# Altium PCB Driver Morpheus v5.2 PONTE H.PcbDoc
Units mm, origin at the board's own origin, x right, y up, seen from the top; angles counter-clockwise.
Board outline 51.56 x 48.03 mm, 2 copper layers (Top Layer, Bottom Layer); 56 components, 26 nets, 158 pads, 23 vias.
Unrouted connection lines stored in the file: 9.
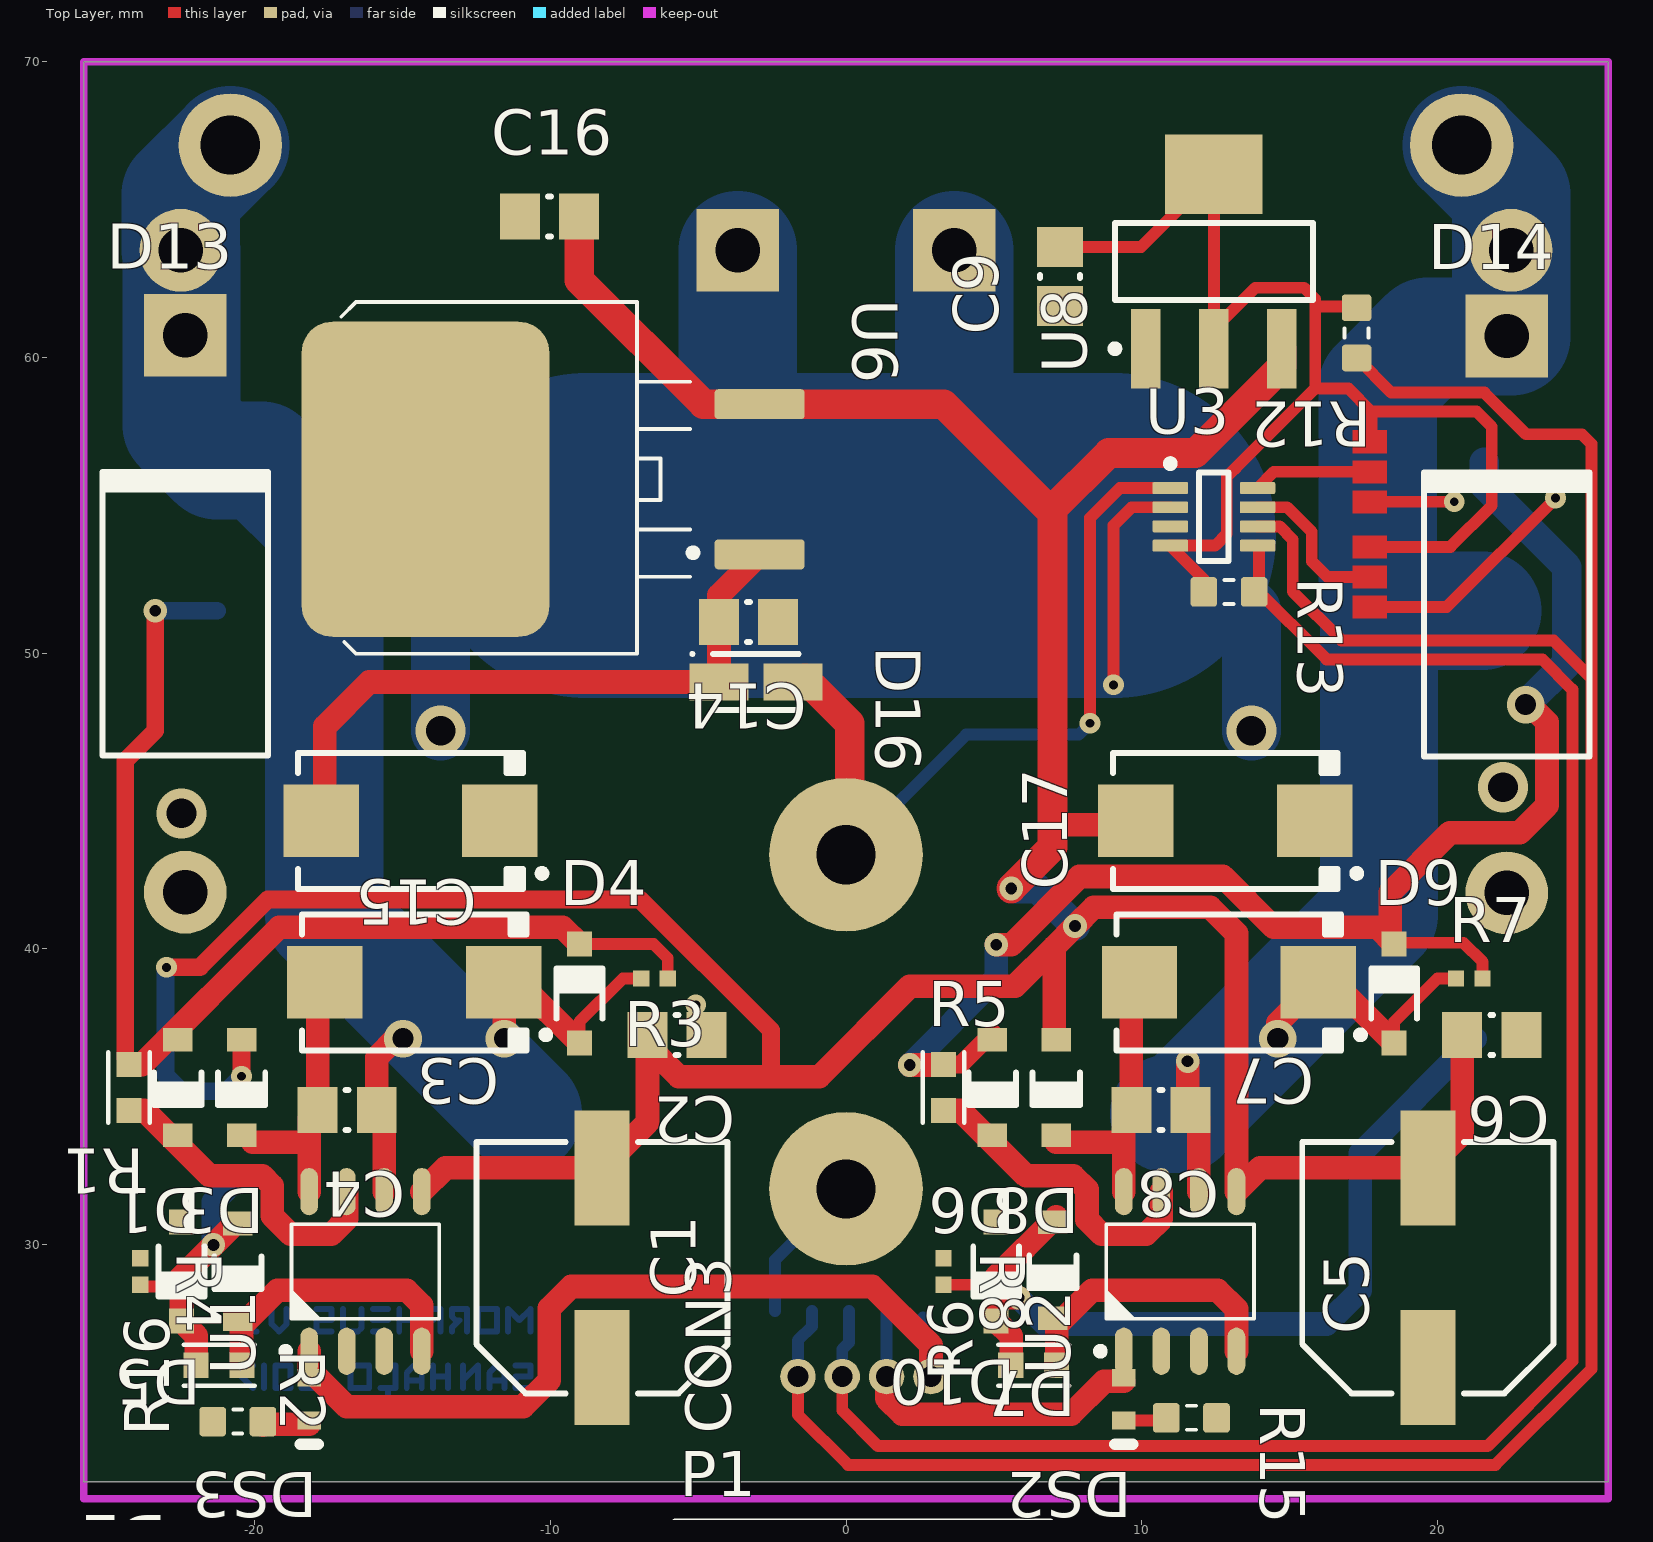
[diagram p0: Top Layer view]
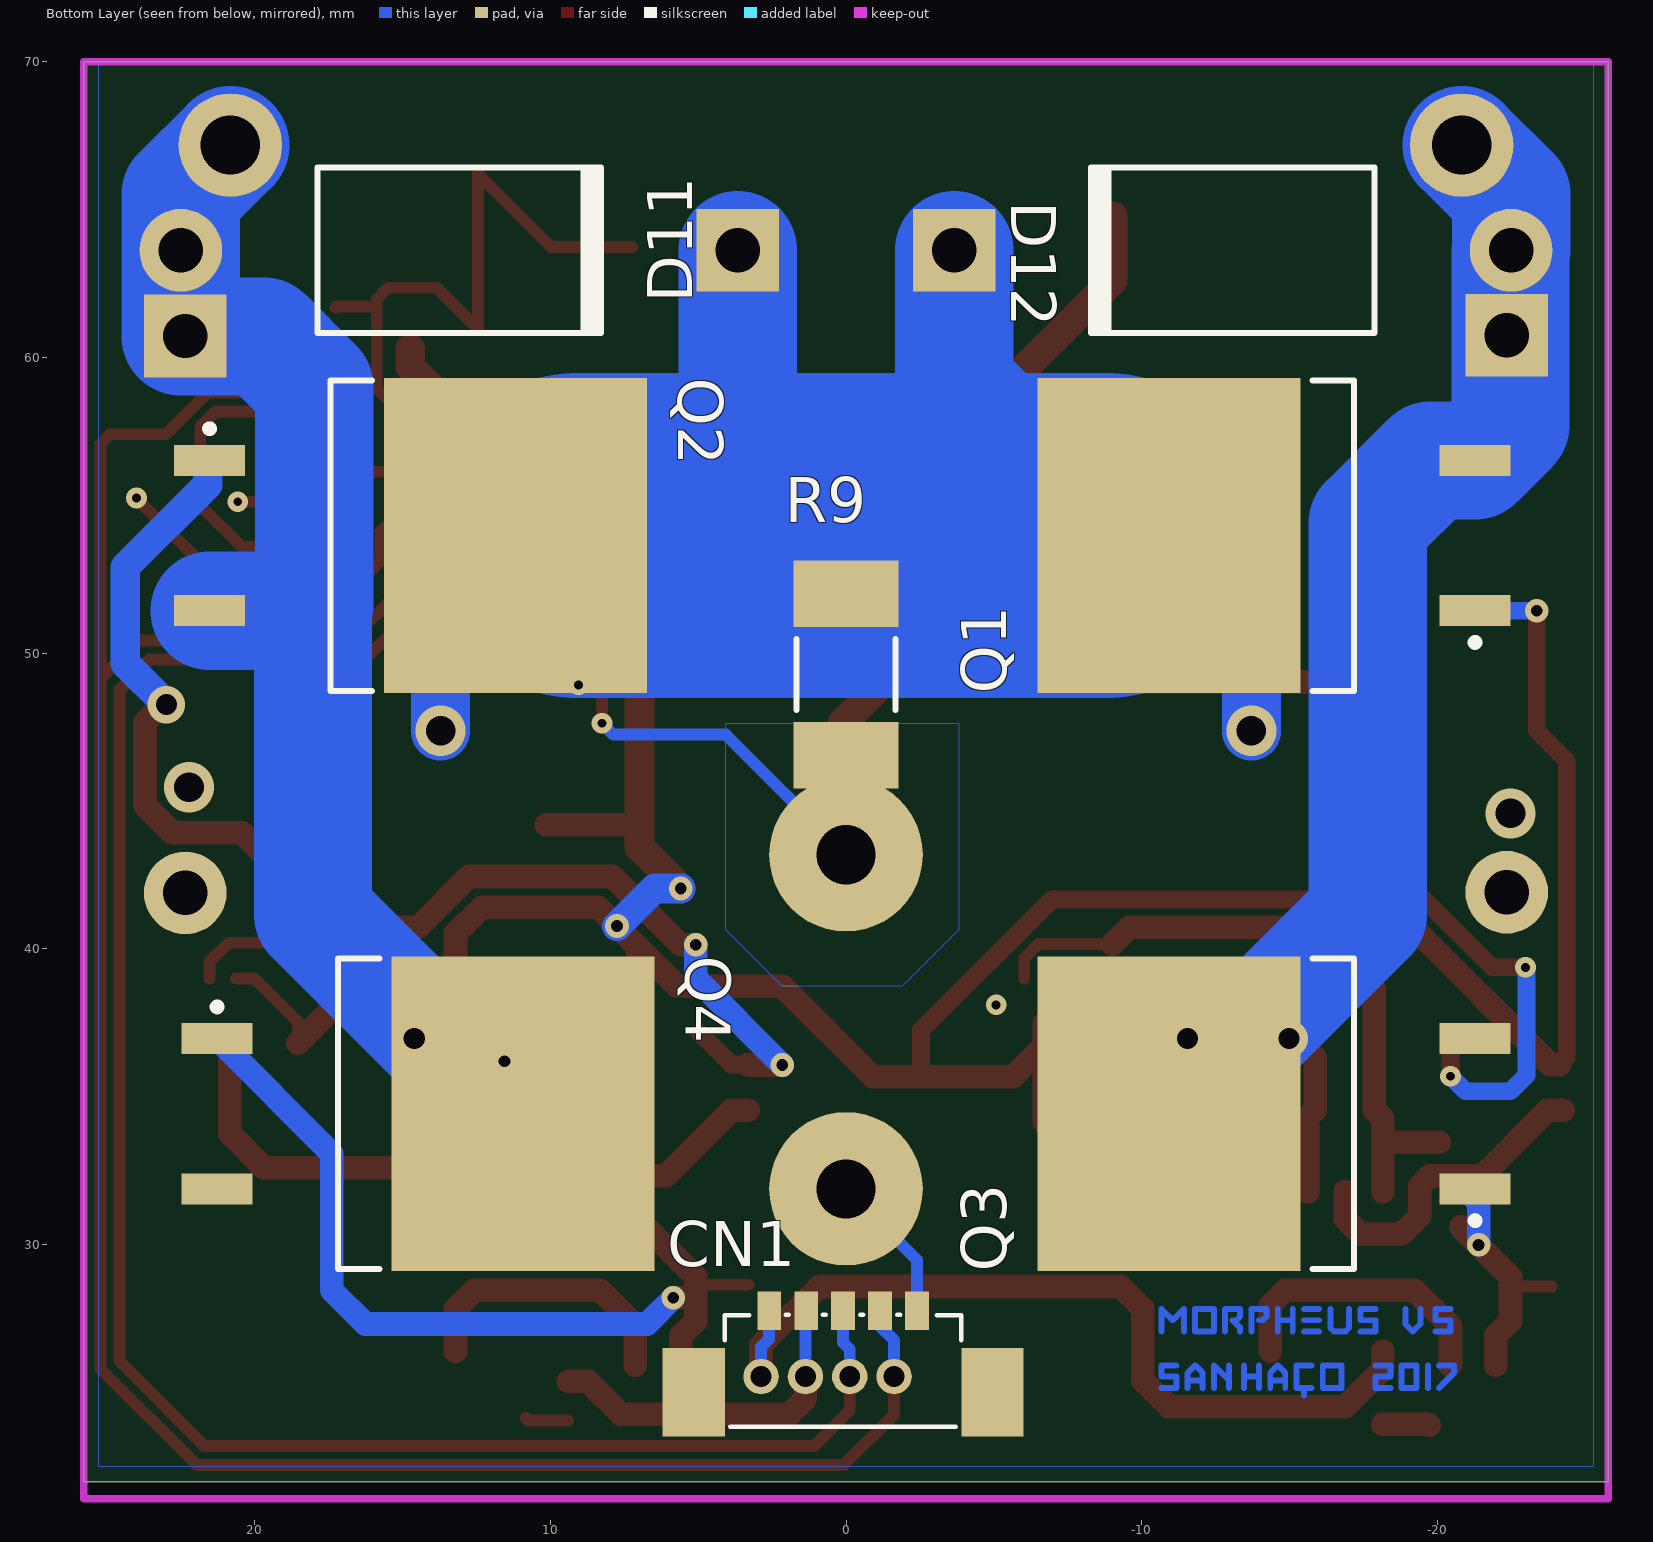
[diagram p1: Bottom Layer view, seen from below]

## Layer stack, top to bottom
Top Solder: solder mask 0.0102, Solder Resist, Dk 3.5
Top Layer: signal copper 0.0356
Dielectric 1: dielectric 0.32, FR-4, Dk 4.8
Bottom Layer: signal copper 0.0356
Bottom Solder: solder mask 0.0102, Solder Resist, Dk 3.5

## Board outline
-25.781,21.971 -25.781,70 25.781,70 25.781,21.971

## Design rules (kind name [scope] priority, off if disabled: settings)
Clearance [All] p1: gap=0.24 ignorepadtopadclearanceinfootprint=FALSE except(0: Arc-Hole Track-Hole SMDPad-Hole THPad-Hole Via-Hole Fill-Hole Poly-Hole Region-Hole Text-Hole; 0.7: Track-Region)
PlaneConnect [All] p1: planeconnectstyle=Direct reliefexpansion=0.508 reliefentries=4 reliefconductorwidth=0.254 reliefairgap=0.254
PolygonConnect [All] p1: connectstyle=Direct reliefconductorwidth=0.254 reliefentries=4 polygonreliefangle="90 Angle" airgapwidth=0.254
RoutingVias [All] p1: holewidth=0.3 width=0.4 viastyle="Through Hole" minholewidth=0.3 minwidth=0.4 maxholewidth=0.4 maxwidth=0.5
SMDNeckDown [InNet('No Net')] p1: percent=70.000
SolderMaskExpansion [All] p1: expansion=0.102
Width [All] p1: maxlimit=15 minlimit=0.01 preferedwidth=0.4
29 further rules are at their usual default settings.

## Classes and differential pairs
component class "Driver Morpheus v5.2 SENSOR CORRENTE": C9 R12 R13 U3
component class "Driver Morpheus v5.2 PONTE H": C1 C2 C3 C4 C5 C6 C7 C8 C14 C15 C16 C17 C18 CN1 CON3 D1 D2 D3 D4 D5 D6 D7 D8 D9 D10 D11 D12 D13 D14 D16 DS2 DS3 P1 Q1 Q2 Q3 Q4 R1 R2 R3 R4 R5 R6 R7 R8 R9 R15 R16 U1 U2 U6 U8

## Components (designator, comment, footprint, x,y, rotation, side; value= is the part's Value field where it differs from the comment)
C1 "100uF 25v" CAPAE9083X70M -8.255,29.21 r90 top
C2 "CAP 100nF 25V 0805(2012)" CAPC0805(2012)145_M#1 -5.715,37.084 r180 top value=100nF
C3 "Cap_10u_35v" "CAP POL 2917/7343" -14.605,38.862 r180 top
C4 "CAP 100nF 25V 0805(2012)" CAPC0805(2012)145_M#2 158.766,-39.497 r180 top value=100nF
C5 "100uF 25v" CAPAE9083X70M 19.685,29.21 r90 top
C6 "CAP 100nF 25V 0805(2012)" CAPC0805(2012)145_M#1 21.844,37.084 r180 top value=100nF
C7 "Cap_10u_35v" "CAP POL 2917/7343" 12.954,38.862 r180 top
C8 "CAP 100nF 25V 0805(2012)" CAPC0805(2012)145_M#2 186.293,-39.497 r180 top value=100nF
C9 "CAP 100nF 25V 0805(2012)" CAPC0805(2012)145_M#1 7.239,62.738 r90 top value=100nF
C14 "CAP 100nF 25V 0805(2012)" CAPC0805(2012)145_M#1 -3.302,51.054 r180 top value=100nF
C15 "Cap_10u_35v" "CAP POL 2917/7343" -14.732,44.323 r180 top
C16 "CAP 100nF 25V 0805(2012)" CAPC0805(2012)145_M#1 -10.033,64.77 r0 top value=100nF
C17 "Cap_10u_35v" "CAP POL 2917/7343" 12.827,44.323 r180 top
C18 "CAP 100nF 25V 0805(2012)" CAPC0805(2012)145_M#1 31.575,42.75 r0 top value=100nF
CN1 "53398-0571" 53398-05 0.1,26.5 r180 bottom
CON3 "B4B-ZR" B4B-ZR 2.873,25.527 r180 top
D1 "1N4148W" JSCJ-SOD-123-2_V -22.606,35.306 r270 top
D2 "1N4148W" JSCJ-SOD-123-2_V -20.572,29.083 r270 top
D3 "1N4148W" JSCJ-SOD-123-2_V -20.447,35.306 r270 top
D4 "MMSZ5246B-E3-08" VISH-SOD-123-2_V -9.017,38.481 r90 top
D5 "MMSZ5246B-E3-08" VISH-SOD-123-2_V -22.479,29.083 r270 top
D6 "1N4148W" JSCJ-SOD-123-2_V 4.953,35.306 r270 top
D7 "1N4148W" JSCJ-SOD-123-2_V 7,29.125 r270 top
D8 "1N4148W" JSCJ-SOD-123-2_V 7.112,35.306 r270 top
D9 "MMSZ5246B-E3-08" VISH-SOD-123-2_V 18.542,38.481 r90 top
D10 "MMSZ5246B-E3-08" VISH-SOD-123-2_V 5.08,29.083 r270 top
D11 "Diode 1N5408" DO-201AD -13.081,63.627 r0 bottom
D12 "Diode 1N5408" DO-201AD 13.081,63.627 r180 bottom
D13 "Diode 1N5408" DO-201AD -22.352,51.33 r90 top
D14 "Diode 1N5408" DO-201AD 22.352,51.308 r90 top
D16 "100V; 1.5A" DIOM2818X18M -3.048,49.022 r0 top value="Vf = 1.15V @ 1.5A (Max)"
DS2 "TLMB1100-GS08" VISH-TLMX1100-2_V 9.398,24.765 r270 top
DS3 "TLMB1100-GS08" VISH-TLMX1100-2_V -18.161,24.765 r270 top
P1 "Header 5" HDR1X5 5.65,19.35 r180 top
Q1 "IRF3205S" D2PAK_N -14.478,53.975 r0 bottom
Q2 "IRF3205S" D2PAK_N 14.732,53.975 r180 bottom
Q3 "IRF3205S" D2PAK_N -14.478,34.417 r0 bottom
Q4 "IRF3205S" D2PAK_N 14.478,34.417 r180 bottom
R1 "22" SMD-0603-RES -24.257,35.306 r180 top
R2 "22" SMD-0603-RES -21.209,25.908 r270 top
R3 "RC0402JR-071KL" RES-0402 -6.477,38.989 r0 top value=1K
R4 "RC0402JR-071KL" RES-0402 -23.876,29.083 r270 top value=1K
R5 "22" SMD-0603-RES 3.302,35.306 r0 top
R6 "22" SMD-0603-RES 6.35,25.908 r90 top
R7 "RC0402JR-071KL" RES-0402 21.082,38.989 r0 top value=1K
R8 "RC0402JR-071KL" RES-0402 3.302,29.083 r270 top value=1K
R9 "KRL9045-C-R008-F-T1" RESC6332X09M 0,49.276 r90 bottom
R12 "Thick Film" RESC1608X55N 17.272,60.833 r270 top value=10K
R13 "Thick Film" RESC1608X55N 12.954,52.07 r0 top value=10K
R15 "Thick Film" RESC1608X55N 11.684,24.13 r0 top value=220R
R16 "Thick Film" RESC1608X55N -20.574,24.003 r180 top value=220R
U1 "IR2184" SOIC127P600X175-8AN -16.256,29.083 r90 top
U2 "IR2184" SOIC127P600X175-8AN 11.303,29.083 r90 top
U3 "INA219AIDCNR" DCN0008A_M 12.446,54.61 r0 top
U6 "L7812" D2PAK-3 -8.572,55.88 r0 top
U8 "LD1117AS33TR" SOT-223_M 12.446,63.246 r90 top

## Footprints (in the part's own frame and the unit in brackets; to place one, negate y for a bottom-side part, rotate by r counter-clockwise, add the part's x,y. Pads: shape width x height; smd on the part's side, far side on the other; paste and mask are expansions set on the pad)
53398-05 [mm]
  rect 0.8x1.3 smd: 1(-2.5,1.25) 2(-1.25,1.25) 3(0,1.25) 4(1.25,1.25) 5(2.5,1.25)
  rect 2.1x3 smd: PAD1(-5.05,-1.5) PAD2(5.05,-1.5)
  silkscreen extent -4,-2.67 4,1.12, body extent -5.7,-2.61 5.7,1.59, height 4.7
B4B-ZR [mm]
  round 1.2 hole 0.7: 1(0,0) 2(1.5,0) 3(3,0) 4(4.5,0)
  body extent -1.5,-1.3 6,2.2, height 4.5
"CAP POL 2917/7343" [mm] "Molded Capacitor, 2-Leads, Body 7.30x4.30mm, IPC Medium Density"
  rect 2.55x2.45 smd: 1(-3.025,0) 2(3.025,0)
  silkscreen extent -4.58,-2.3 3.8,2.3, body extent -3.65,-2.15 3.65,2.15, height 4.1
CAPAE9083X70M [mm] "Aluminum Electrolytic Capacitor, Body 8,30x8,30x7,00mm, IPC Low Density"
  rect 3.9x1.85 smd: 1(-3.375,0) 2(3.375,0)
  silkscreen extent -4.25,-4.25 4.25,4.25, body extent -4.25,-4.25 4.25,4.25, height 7
CAPC0805(2012)145_M#1 [mm] "Chip Capacitor, Body 2.0x1.2mm, Height 1.45mm, IPC Low Density"
  rect 1.35x1.55 smd: 1(-1,0) 2(1,0)
  silkscreen extent -0.05,-0.67 0.05,0.67, body extent -1.1,-0.72 1.1,0.72, height 1.45
CAPC0805(2012)145_M#2 [mm] "Chip Capacitor, Body 2.0x1.2mm, Height 1.45mm, IPC Low Density"
  rect 1.35x1.55 smd: 1(174.641,-74.041) 2(176.641,-74.041)
  silkscreen extent 175.59,-74.72 175.69,-73.37, body extent 174.54,-74.77 176.74,-73.32, height 1.45
D2PAK-3 [mil] "D-PAK/TO-263-3; 3 Leads (1 Cropped); Body 14.7 (inc. leads) x 10.2 mm (LxW max)"
  round 20 on Mech15: 0(0,0)
  rrect25% 120x40 smd: 1(222.5,-100) 3(222.5,100)
  rrect25% 330x420 smd: 2(-222.5,0)
  silkscreen extent -335,-232 139,236, body extent -361,-197 256,197, height 189
D2PAK_N [mm] "D-PAK/TO-263-3; 3 Leads (1 Cropped); Body 14.7 (inc. leads) x 10.2 mm (LxW max)"
  rect 2.4x1.05 smd: 1(-6.8,2.54) 3(-6.8,-2.54)
  rect 8.9x10.65 smd: 2(3.55,0)
  silkscreen extent -6.92,-5.25 -1.3,5.25, body extent -2.7,-5.28 6.3,5.28, height 4.69
DCN0008A_M [mm] "SOT23, 8-Leads, Body 3x1.75mm, Pitch 0.65mm, IPC Low Density"
  rrect22% 1.2x0.4 smd: 1(-1.475,0.975) 2(-1.475,0.325) 3(-1.475,-0.325) 4(-1.475,-0.975) 5(1.475,-0.975) 6(1.475,-0.325) 7(1.475,0.325) 8(1.475,0.975)
  silkscreen extent -1.6,-1.5 0.5,1.92, body extent -0.88,-1.5 0.87,1.5, height 1.45
DIOM2818X18M [mm] "Molded Diode, 2-Leads, Body 2,80x1,80mm, IPC Low Density"
  rect 2x1.25 smd: A(1.25,0) K(-1.25,0)
  silkscreen extent -2.2,-0.95 1.45,1, body extent -1.45,-0.95 1.45,0.95, height 1.8
DO-201AD [mm] "Diode, Axial; Body 9.5 x 5.6 mm (LxDia. max), Lead Dia. 1.32 mm (max)"
  round 2.8 hole 1.5: 1(-9.42,0)
  rect 2.8x2.8 hole 1.5: 2(9.42,0)
  silkscreen extent -4.8,-2.8 4.9,2.8
HDR1X5 [mm] "Connector; Header; 5 Position"
  rect 1.5x1.5 hole 0.9: 1(0,0)
  round 1.5 hole 0.9: 2(2.54,0) 3(5.08,0) 4(7.62,0) 5(10.16,0)
  silkscreen extent -1.27,-1.27 11.43,1.27
JSCJ-SOD-123-2_V [mm] "SMD, 2-Leads, Body 2.7x1.6mm, Height 1.25mm"
  rect 0.8x1 smd: 1(-1.62,0) 2(1.62,0)
  silkscreen extent -0.5,-0.8 0.6,0.8, body extent -1.35,-0.8 1.35,0.8, height 1.25
RES-0402 [mm]
  rect 0.55x0.55 smd: 1(-0.45,0) 2(0.45,0)
  body extent -0.53,-0.27 0.53,0.28, height 0.4
RESC1608X55N [mm] "Chip Resistor, Body 1.6x0.8mm, EIA 0603, IPC Medium Density"
  round 0.254 on Mech15: 0(0,0)
  rrect25% 0.9x1 smd: 1(-0.85,0) 2(0.85,0)
  Top Layer pour cut-out: -0.6,0.5 -0.4,0.7 0.4,0.7 0.6,0.5 0.6,-0.5 0.4,-0.7 -0.4,-0.7 -0.6,-0.5
  silkscreen extent -0.15,-0.41 0.15,0.41, body extent -0.87,-0.47 0.88,0.48, height 0.54
RESC6332X09M [mm] "Chip Resistor, 2-Leads, Body 6,35x3,18mm, IPC Low Density"
  rect 2.25x3.55 smd: 1(-2.725,0) 2(2.725,0)
  silkscreen extent -1.2,-1.68 1.2,1.68, body extent -3.3,-1.72 3.3,1.72, height 0.87
SMD-0603-RES [mm]
  rect 0.85x0.85 smd: 1(0,0.775) 2(0,-0.775)
  silkscreen extent -0.7,-1.2 0.7,1.2, body extent -0.4,-0.85 0.4,0.85, height 0.56
SOIC127P600X175-8AN [mm] "SOIC, 8-Leads, Body 4.9x3.9mm, Pitch 1.27mm, IPC Medium Density"
  round 1 on Mech15: 0(0,0)
  oval 1.6x0.6 smd: 1(-2.7,1.905) 2(-2.7,0.635) 3(-2.7,-0.635) 4(-2.7,-1.905) 5(2.7,-1.905) 6(2.7,-0.635) 7(2.7,0.635) 8(2.7,1.905)
  silkscreen extent -2.82,-2.5 1.6,2.82, body extent -3,-2.45 3,2.45, height 1.75
SOT-223_M [mm] "SOT223, 4-Leads, Body 6.5x3.5mm, Pitch 2.3mm, Lead Span 7mm, IPC Low Density"
  rect 2.7x1 smd: 1(-2.95,2.3) 2(-2.95,0) 3(-2.95,-2.3)
  rect 2.7x3.3 smd: 4(2.95,0)
  silkscreen extent -3.07,-3.35 1.3,3.47, body extent -1.85,-3.35 1.85,3.35, height 1.8
VISH-SOD-123-2_V [mm] "SMD, 2-Leads, Body 2.7x1.55mm, Height 1.35mm"
  rect 0.85x0.85 smd: 1(-1.675,0) 2(1.675,0)
  silkscreen extent -0.85,-0.78 0.85,0.78, body extent -1.35,-0.77 1.35,0.77, height 1.35
VISH-TLMX1100-2_V [mm] "SMD, 2-Leads, Body 1.6x0.8mm"
  rect 0.6x0.8 smd: 1(-0.725,0) 2(0.725,0)
  silkscreen extent 1.53,-0.3 1.53,0.3, body extent -0.8,-0.4 0.8,0.4, height 0.65

## Part data
C1: library part Cap_10u_35v
C2 C4 C6 C8 C9 C14 C16 C18: library part CMP-1036-04408-1, "CAP 100nF 25V ±5% 0805 (2012 Metric) Thickness 1.45mm SMD", Case-EIA=0805, Case-Metric=2012, Rated Voltage="25 V", Tolerance=±5%, Max Thickness="1.45 mm", Technology=SMT
C5: library part Cap_100u_25v, "Cap Tântalo"
CN1: library part 53398-0571-5, "CONN HEADER 5POS 1.25MM VERT SM", Cod EMS=05.285.005.201, Part No=53398-0571
D1 D2 D3 D6 D7 D8: library part CMP-0914-00001-1, "Fast Switching Diode, 75 V, 150 mA, 2-Pin 2.7 x 1.6 x 1.25 mm SMD, Tape and Reel", Manufacturer="Changjiang Electronics", ComponentLink1Description="Manufacturer URL", ComponentLink1URL=http://www.cj-elec.com/, ComponentLink2Description=Datasheet, ComponentLink2URL=http://www.cj-elec.com/txUpfile/20121613352740313.pdf, ComponentLink3Description="Package Specification", ComponentLink3URL=http://www.cj-elec.com/txUpfile/201412112231195145.pdf, DatasheetVersion="Rev. A", IO (mA)=150, IR (uA)=1, Mounting Technology="Surface Mount", PackageDescription="2-Pin SMD, Body 2.7 x 1.6 mm, Height 1.25 mm", PackageReference=SOD-123-2, PackageVersion="Rev. A", Packing="Tape and Reel", PartNumber=1N4148W, PD (mW)=350, Trr (ns)=4, TSTG (degC)="-55 to 150", VF (V)=1.25, VR (V)=75
D4 D5 D9 D10: library part CMP-0931-00032-1, "Small Signal Zener Diode, 16 V +/- 5%, -55 to 155 degC, 2-Pin SOD-123, RoHS, Tape and Reel", Manufacturer="Vishay Semiconductor", Operating Temperature="-55 to 150 degC", Power Dissipation (mW)=500, Test Current (IZT1) (mA)=7.8, Tolerance="+/- 5%", Zener Voltage (NOM.) (V)=16, ComponentLink1Description="Manufacturer URL", ComponentLink1URL=http://www.vishay.com/, ComponentLink2Description=Datasheet, ComponentLink2URL=http://www.vishay.com/docs/85774/mmsz5225.pdf, ComponentLink3Description="Package Specification", ComponentLink3URL=http://www.vishay.com/docs/85774/mmsz5225.pdf, DatasheetVersion="Rev. 1.9", Int. Construction=Single, Mounting Technology="Surface Mount", PackageDescription="2-Pin SMD, Body 2.7 x 1.55 mm, Height 1.35 mm", PackageReference=SOD-123-2, PackageVersion="Rev. 1.9", Packing="Tape and Reel", PartNumber=MMSZ5246B-E3-08, RoHS=TRUE, Zener Impedance (IZT1) (Max.) (Ohm)=17
D11 D12 D13 D14: "3 Amp Medium Power Silicon Rectifier Diode", ComponentLink1Description="Manufacturer Link", ComponentLink1URL=http://www.irf.com/, DatasheetVersion=Aug-1984, LatestRevisionDate=17-Jul-2002, LatestRevisionNote="Re-released for DXP Platform.", PackageDescription="Diode, Axial; Body 9.5 x 5.3 mm (LxDia. max), Lead Dia. 1.32 mm (max)", PackageReference=DO-201AD, Published=8-Jun-2000, Publisher="Altium Limited"
D16: library part DIODE_100V_1.5A_SMA, "Diode SMD 100V 1.5A SMA", Manufacturer 1="Diodes Inc", Manufacturer Part Number 1=S2BA-13-F, Package / Case="DO-214AC, SMA", Supplier Part Number 1=S2BA-FDICT-ND, Diode Type=Standard, Material=Si, Ratings="100V; 1.5A", SCDType=source, Supplier 1=Digi-Key
DS2 DS3: library part CMP-1666-00028-1, "Blue LED, 10 mA, 3.9 V, -40 to 100 degC, 2-Pin SMD (0603), RoHS, Tape and Reel", Capacitance="10 nF", Case\Package=Radial, Max Operating Temperature="125 degC", Min Operating Temperature="-55 degC", Package Quantity=500, Tolerance=10%, Type (Capacitors)=X7R, Voltage Rating="100 V", ComponentLink1Description="Manufacturer URL", ComponentLink1URL=http://www.vishay.com/, ComponentLink2Description=Datasheet, ComponentLink2URL=http://download.siliconexpert.com/pdfs/2016/8/7/12/43/26/667/vsh_/manual/379263299541529tlmb1100.pdf, DatasheetVersion="Rev. 2.7, 03/2016", Height="2.54 mm", Lead Pitch="2.54 mm", Length="5.33 mm", Mount="Through Hole", PackageDescription="2-Pin Surface Mount Device, Body 1.6 x 0.8 mm", PackageReference=0603, Packaging=Bulk, Pins=2, Radiation Hardening=No, REACH SVHC="No SVHC", RoHSCompliant=true, Width="3.81 mm"
P1: "Header, 5-Pin", LatestRevisionDate=17-Jul-2002, LatestRevisionNote="Re-released for DXP Platform.", Publisher="Altium Limited"
Q1 Q2 Q3 Q4: "HEXFET Power MOSFET", ComponentLink1Description="Manufacturer Link", ComponentLink1URL=http://www.irf.com/, ComponentLink2Description=Datasheet, ComponentLink2URL=http://www.irf.com/product-info/datasheets/data/irf3205s.pdf, DatasheetVersion=Aug-1997, LatestRevisionDate=20-Nov-2009, LatestRevisionNote="IPC-7351 Footprint Added.", PackageDescription="3-Pin Transistor Outline Package 2.54 mm Pitch, 15.1 mm Lead Span", PackageReference=D2PAK, Published=8-Jun-2000, Publisher="Altium Limited"
R1 R2 R5 R6: library part ERJ-3EKF22R0V, "RES SMD 22 OHM 1% 1/10W 0603", Digi-Key Part Number=P22.0HCT-ND, Manufacturer="Panasonic Electronic Components", Operating Temperature="-55°C ~ 155°C", Package / Case="0603 (1608 Metric)", Power (Watts)="0.1W, 1/10W", Supplier Device Package=0603, Temperature Coefficient=±100ppm/°C, Tolerance=±1%, @ qty=1500, Composition="Thick Film", Datasheets=http://industrial.panasonic.com/www-cgi/jvcr13pz.cgi?E+PZ+3+AOA0002+ERJ3EKF22R0V+7+WW, Factory Stock=0, Failure Rate=-, Features="Automotive AEC-Q200", Height - Seated (Max)="0.022\" (0.55mm)", Image=//media.digikey.com/Photos/Panasonic%20Photos/MFG_ERJ-P6W%20Series.jpg, Minimum Quantity=1, Number of Terminations=2, Packaging="Cut Tape (CT)", Part Number=ERJ-3EKF22R0V, Part Status=Active, Quantity Available=100321, Series=ERJ, Size / Dimension="0.063\" L x 0.031\" W (1.60mm x 0.80mm)", Unit Price (USD)=0.00379
R3 R4 R7 R8: library part "RES 1K 0402", "RES SMD 1K OHM 5% 1/16W 0402"
R9: library part CMP-1666-00018-2, "Chip Resistor, 0.008 Ohm, +/- 1%, 4 W", Case/Package=1206, Case Code (Metric)=3216, Max Operating Temperature="170 degC", Min Operating Temperature="-65 degC", PartNumber=WSLP12061L000FEA, Resistance="0.001 Ohm", Tolerance=1%, Case Code (Imperial)=1206, ComponentLink1Description="Manufacturer URL", ComponentLink1URL=http://www.vishay.com/, ComponentLink2Description=Datasheet, ComponentLink2URL=http://www.farnell.com/datasheets/2049155.pdf, DatasheetVersion=04/2015, Height="0.635 mm", Length="3.2 mm", Mounting Technology="Surface Mount", PackageDescription="2-Pin Surface Mount Device, Body 3.2 x 1.6 mm", Packaging="Tape and Reel", REACH SVHC=Unknown, RoHSCompliant=True, Width="1.6 mm"
R12 R13: library part RES_10K_0603_1%, "Resistor SMD chip 10k Ohm 0.1W 1% 0603", Manufacturer 1=Yageo, Manufacturer Part Number 1=RC0603FR-0710KL, Package / Case="0603 (1608 Metric)", Ratings=1/10W, Supplier Part Number 1=311-10.0KHRCT-ND, Tolerance=±1%, SCDType=spec, Supplier 1=Digi-Key
R15 R16: library part RES_220R_0603_5%, "Resistor SMD chip 220 Ohm 0.1W 5% 0603", Manufacturer 1=Yageo, Manufacturer 2="Panasonic Electronic Components", Manufacturer 3="Stackpole Electronics Inc", Manufacturer 4="Rohm Semiconductor", Manufacturer 5="Royal Ohm", Manufacturer Part Number 1=RC0603JR-07220RL, Manufacturer Part Number 2=ERJ-3GEYJ221V, Manufacturer Part Number 3=RMCF0603JT220R, Manufacturer Part Number 4=MCR03ERTJ221, Manufacturer Part Number 5=0603WAJ0221, Package / Case="0603 (1608 metric)", Ratings="1/10 W", Supplier Part Number 1=311-220GRCT-ND, Tolerance=±5%, ComponentLink1Description=http://www.yageo.com/documents/recent/PYu-RC0603_51_RoHS_L_4.pdf, ComponentLink1URL=http://www.yageo.com/documents/recent/PYu-RC0603_51_RoHS_L_4.pdf, ComponentLink2Description=http://industrial.panasonic.com/www-cgi/jvcr13pz.cgi?E+PZ+3+AOA0001+ERJ3GEYJ221V+7+WW, ComponentLink2URL=http://industrial.panasonic.com/www-cgi/jvcr13pz.cgi?E+PZ+3+AOA0001+ERJ3GEYJ221V+7+WW, ComponentLink3Description=http://www.seielect.com/Catalog/SEI-RMCF_RMCP.pdf, ComponentLink3URL=http://www.seielect.com/Catalog/SEI-RMCF_RMCP.pdf, ComponentLink4Description=http://rohmfs.rohm.com/en/products/databook/datasheet/passive/resistor/chip_resistor/mcr_g.pdf, ComponentLink4URL=http://rohmfs.rohm.com/en/products/databook/datasheet/passive/resistor/chip_resistor/mcr_g.pdf, Material="Thick Film", RoHS 1="RoHS Compliant", RoHS 2="RoHS Compliant", RoHS 3="RoHS Compliant", RoHS 4="RoHS Compliant", SCDType=spec, Supplier 1=Digi-Key, Supplier 2=Digi-Key, Supplier 3=Digi-Key, Supplier 4=Digi-Key, Supplier Part Number 2=P220GCT-ND, Supplier Part Number 3=RMCF0603JT220RCT-ND, Supplier Part Number 4=RHM220CGCT-ND
U1 U2: PSpiceTemplate="X^@REFDES %VCC %IN %SD %COM %VB %HO %VS %LO @MODEL PARAMS:  ?CDELAY|CDELAY=@CDELAY||CDELAY=50N| ?RDELAY|RDELAY=@RDELAY||RDELAY=50| ?T1|T1=@T1||T1=-40| ?T2|T2=@T2||T2=25| ?T3|T3=@T3||T3=125| ?V1|V1=@V1||V1=10| ?V2|V2=@V2||V2=15| ?V3|V3=@V3||V3=20| ?TOFFT1|TOFFT1=@TOFFT1||TOFFT1=270N| ?TOFFT2|TOFFT2=@TOFFT2||TOFFT2=270N| ?TOFFT3|TOFFT3=@TOFFT3||TOFFT3=270N| ?TOFFV1|TOFFV1=@TOFFV1||TOFFV1=270N| ?TOFFV2|TOFFV2=@TOFFV2||TOFFV2=270N| ?TOFFV3|TOFFV3=@TOFFV3||TOFFV3=270N| ?TONT1|TONT1=@TONT1||TONT1=210N| ?TONT2|TONT2=@TONT2||TONT2=210N| ?TONT3|TONT3=@TONT3||TONT3=210N| ?TONV1|TONV1=@TONV1||TONV1=210N| ?TONV2|TONV2=@TONV2||TONV2=210N| ?TONV3|TONV3=@TONV3||TONV3=210N|", CDELAY=50N, RDELAY=50, T1=-40, T2=25, T3=125, TOFFT1=270N, TOFFT2=270N, TOFFT3=270N, TOFFV1=270N, TOFFV2=270N, TOFFV3=270N, TONT1=210N, TONT2=210N, TONT3=210N, TONV1=210N, TONV2=210N, TONV3=210N, V1=10, V2=15, V3=20
U3: library part CMP-0704-00041-2, "Zero-Drift, Bi-directional Current / Power Monitor, 3 to 5.5 V, -40 to 125 degC, 8-pin SOP (DCN8), Green (RoHS & no Sb/Br)", Manufacturer="Texas Instruments", Quiescent Current (+/-)(Typ)(mA)=0.7, Rating=Catalog, CMRR(Min)(dB)=100, Code_JEDEC=MO-178, Common Mode Range(Max)(V)=26, Common Mode Range(Min)(V)=0, ComponentLink1Description="Manufacturer URL", ComponentLink1URL=http://www.ti.com/, ComponentLink2Description=Datasheet, ComponentLink2URL=http://www.ti.com/general/docs/lit/getliterature.tsp?genericPartNumber=INA219&fileType=pdf, ComponentLink3Description="Package Specification", ComponentLink3URL=http://www.ti.com/lit/ml/mpds099c/mpds099c.pdf, DatasheetVersion=SBOS448F, Eco-Plan="Green (RoHS & no Sb/Br)", Gain(V/V)="1, 0.5, 0.25, 0.125", Input Offset (+/-)(Max)(uV)=100, Mounting Technology="Surface Mount", PackageDescription="8-Pin Plastic Small Outline, Body 1.6 x 2.9 mm, Pitch 0.65 mm", PackageReference=DCN0008A, PackageVersion="4202106/D, 11/2009", PartNumber=INA219AIDCNR, Small-Signal Bandwidth(Typ)(MHz)=0.011, SubFamily="Current Shunt Monitor", Vs(Max)(V)=5.5, Vs(Min)(V)=3
U6: library part LM7812
U8: library part CMP-0244-00316-1, "1A, Low Drop Positive Voltage Regulator, 3.3V, 4-Pin SOT-223, Tape and Reel", ComponentLink1Description="Manufacturer URL", ComponentLink1URL=http://www.st.com, ComponentLink2Description=Datasheet, ComponentLink2URL=http://www.st.com/internet/com/TECHNICAL_RESOURCES/TECHNICAL_LITERATURE/DATASHEET/CD00002116.pdf, DatasheetVersion=2/12/2011, PackageDescription="4-Pin SOT-223 Package, 6.5 x 3.5 mm Body, 2.3 mm Pitch, 7 mm Lead Span", PackageReference=SOT-223, PackageVersion=2010

## Free pads (board coordinates)
  round 5.2 hole 2: 2(0,43.18) 5(0,31.877)
  round 3.5 hole 2: 3(-20.828,67.183) 4(20.828,67.183)

## Via types
v1: diameter 0.8, hole 0.4, Top Layer to Bottom Layer, 8 vias
v2: diameter 0.7, hole 0.3, Top Layer to Bottom Layer, 7 vias
v3: diameter 1.7, hole 1, Top Layer to Bottom Layer, 4 vias
v4: diameter 1.27, hole 0.711, Top Layer to Bottom Layer, 4 vias

## Nets (pads, with @x,y where several pads share a name; then routed paths per layer and width w, separated by ;. In a path a pad name is that pad's centre, name@x,y a point inside that pad or via, vN(x,y) a via of type N, cw(c..) or ccw(c..) an arc to the next point about the centre after c; other vN are vias at no path point)
+3.3v: C9.2 C18.2 R12.1 R13.1 U3.4 U8.2 U8.4 | length 45.4
  Top Layer w0.4: C9.2 9.988,63.738 U8.4 12.446,60.96 13.843,62.357 15.494,62.357 15.875,61.976 15.875,61.722 ; R13.1 12.104,52.502 U3.4 12.485,53.635 ; 12.5,53.65 12.881,54.031 12.881,55.963 13.168,56.25 13.172,56.25 15.875,58.953 ; R12.1 17.233,61.722 15.875,61.722 ; 17.526,53.594 20.447,53.594 21.844,54.991 21.844,57.658 21.331,58.171 17.775,58.171 ; 17.78,57.15 17.78,58.166 17.775,58.171 ; 15.875,58.953 15.875,61.722 ; 15.875,58.953 16.993,58.953 17.775,58.171
+12V: C1.2 C2.2 C5.2 C6.2 C16.2 C17.2 D3.1 D8.1 U1.5 U2.5 U6.3 U8.3 | length 141.9
  Top Layer w0.4: D8.1@7.048,37.219 D8.1@7.112,37.156
  Top Layer w0.6: v2(-22.987,39.37) -21.856,39.37 -19.559,41.667 -6.965,41.667 -2.54,37.242 -2.54,35.923 -2.286,35.669 ; v2(-20.447,35.687) D3.1
  Top Layer w0.8: U1.5 -13.549,32.585 C1.2 -6.715,34.125 -6.715,36.269 ; C2.2@-6.715,37.465 C2.2 -6.715,36.729 -5.655,35.669 -2.286,35.669 -0.907,35.669 2.159,38.735 5.715,38.735 7.048,40.069 ; U6.3@-3.429,58.42 U6.3 ; 6.985,44.196 C17.2@10.137,44.196 ; D8.1@7.048,37.219 7.048,40.069 ; C6.2 20.844,33.744 C5.2 14.01,32.585 U2.5 13.208,40.513 12.319,41.402 8.382,41.402 v1(7.747,40.767) 7.048,40.069
  Top Layer w1: C16.2@-9.017,64.77 -9.017,62.611 -4.826,58.42 U6.3@-3.429,58.42 ; U6.3 3.302,58.42 6.921,54.8 ; v1(5.588,42.037) 6.985,43.434 6.985,44.196 6.985,54.737 6.921,54.8 ; U8.3 14.746,59.699 11.816,56.769 8.89,56.769 6.921,54.8
  Bottom Layer w0.6: v2(-22.987,39.37) -23.018,39.339 -23.018,35.718 -22.479,35.179 -20.955,35.179 v2(-20.447,35.687)
  Bottom Layer w1: v1(5.588,42.037) 6.477,42.037 v1(7.747,40.767)
A0: U3.7 | length 5.4
  Top Layer w0.4: U3.7 14.923,54.935 15.753,54.105 15.753,53.103 16.278,52.578 17.78,52.578
A1: U3.8 | length 4
  Top Layer w0.4: U3.8 14.47,56.134 17.653,56.134
"BAT 5S": D16.A pad.2 R9.1 U3.1 | length 27.2
  Top Layer w0.4: v2(8.255,47.625) 8.255,54.58 9.26,55.585 U3.1
  Top Layer w1: D16.A@-1.397,49.149 0.127,47.625 pad.2@0.127,42.799
  Bottom Layer w0.4: pad.2 4.064,47.244 7.874,47.244 v2(8.255,47.625)
GND: C1.1 C2.1 C5.1 C6.1 C9.1 C14.1 C15.1 C16.1 C17.1 C18.1 CN1.5 CN1.PAD2 D5.1 D10.1 D13.1 D14.1 P1.5 pad.5 Q3.3 Q4.3 R4.1 R8.1 R15.2 R16.2 U1.3 U2.3 U3.3 U6.2 U8.1 | length 15.7
  Top Layer w0.4: 17.653,51.562 20.32,51.562 v2(24.003,55.245) ; 17.893,55.118 v2(20.575,55.118)
  Bottom Layer w0.4: CN1.5 -2.4,29.477 pad.5
  other v2: -5.08,38.1
  other v3: -22.479,44.577 22.225,45.466
IN_1: CN1.1 CN1.PAD1 CON3.1 DS3.1 P1.1 U1.1 | length 29.3
  Top Layer w0.8: U1.1 -18.161,25.781 -16.891,24.511 -10.922,24.511 -10.033,25.4 -10.033,27.837 -9.295,28.575 0.889,28.575 2.873,26.591 CON3.1
  Bottom Layer w0.4: CN1.1@2.6,27.525 2.6,26.8 2.873,26.527 CON3.1
IN_2: CN1.2 CON3.2 DS2.1 P1.2 U2.1 | length 11.6
  Top Layer w0.8: CON3.2 1.373,24.789 1.905,24.257 7.62,24.257 8.726,25.363 DS2.1@9.398,25.363
  Bottom Layer w0.4: CON3.2 CN1.2@1.373,27.727
NetC3_1: C3.1 C4.1 D4.1 D11.1 D13.2 pad.3 Q1.3 Q3.2 R3.1 U1.6 | length 53.7
  Top Layer w0.4: D4.1 -9.017,37.523 -7.551,38.989 R3.1
  Top Layer w0.8: U1.6 -15.621,34.29 C4.1 -15.875,36.322 -15.24,36.957 v4(-14.986,36.957) ; v4(-11.557,36.957) -11.557,38.839 C3.1 -11.073,38.862 D4.1
  Bottom Layer w4: pad.3 -22.501,65.51 D11.1 -22.479,63.605 -22.479,57.716 Q1.3 -19.773,56.515 -17.653,54.395 -17.653,41.142 Q3.2
NetC3_2: C3.2 C4.2 D3.2 U1.8 | length 9.2
  Top Layer w0.8: D3.2@-20.066,33.456 -18.216,33.456 -18.161,33.401 ; U1.8 -18.161,33.401 ; C3.2 -17.875,38.617 C4.2 -18.161,34.258 -18.161,33.401
NetC7_1: C7.1 C8.1 D9.1 D12.1 D14.2 pad.4 Q2.3 Q4.2 R7.1 U2.6 | length 57.6
  Top Layer w0.4: D9.1 18.542,37.523 20.008,38.989 R7.1
  Top Layer w0.8: v1(11.557,36.195) 11.557,34.639 C8.1 11.938,34.258 U2.6 ; v4(14.605,36.957) 14.605,37.488 C7.1 16.486,38.862 D9.1
  Bottom Layer w4: Q4.2 11.303,34.417 18.034,41.148 18.034,51.562 ; pad.4 22.501,65.51 D12.1 22.501,60.706 19.685,60.706 17.985,59.006 17.985,51.611 18.034,51.562 ; Q2.3 18.161,51.435 18.034,51.562
NetC7_2: C7.2 C8.2 D8.2 U2.8 | length 9.6
  Top Layer w0.8: D8.2@7.112,33.456 9.326,33.456 9.398,33.528 ; U2.8 9.398,33.528 ; C7.2 9.652,38.585 C8.2 9.398,34.29 9.398,33.528
NetC14_2: C14.2 C15.2 D16.K U6.1 | length 21.9
  Top Layer w0.8: C15.2@-17.63,44.45 -17.63,47.521 -16.129,49.022 D16.K -4.298,51.05 C14.2 -4.302,51.959 U6.1
NetCN1_3: CN1.3 CON3.3 P1.3 R13.2 U3.5 | length 66.3
  Top Layer w0.4: CON3.3 -0.127,24.384 1.079,23.178 2.159,23.178 21.706,23.178 24.574,26.046 24.574,48.768 23.558,49.784 16.256,49.784 13.799,52.241 13.97,52.412 13.97,53.586 U3.5
  Bottom Layer w0.4: CON3.3 -0.127,26.448 0.1,26.675 CN1.3
NetCN1_4: CN1.4 CON3.4 P1.4 R12.2 U3.6 | length 87.5
  Top Layer w0.4: CON3.4 -1.627,24.233 0.068,22.538 21.971,22.538 25.214,25.781 25.214,49.149 ; U3.6 14.667,54.285 15.113,53.839 15.113,52.08 16.764,50.429 16.759,50.424 23.939,50.424 25.214,49.149 ; R12.2 18.444,58.811 21.596,58.811 23.003,57.404 24.892,57.404 25.214,57.082 25.214,49.149
  Bottom Layer w0.4: CON3.4 -1.627,26.748 -1.15,27.225 CN1.4
NetD1_1: D1.1 D4.2 Q1.1 R1.2 R3.2 | length 39.1
  Top Layer w0.4: D4.2 -6.501,40.156 -6.027,39.682 R3.2
  Top Layer w0.6: R1.2@-24.143,36.081 -24.384,36.322 -24.384,46.355 -23.368,47.371 v1(-23.368,51.435)
  Top Layer w0.8: R1.2@-24.143,36.081 -23.816,36.081 -19.17,40.727 -9.588,40.727 D4.2
  Bottom Layer w0.6: v1(-23.368,51.435) Q1.1
NetD1_2: D1.2 R1.1 U1.7 | length 10.8
  Top Layer w0.8: R1.1 -23.736,34.531 -21.521,32.316 -19.743,32.316 -19.407,31.98 -19.407,30.964 -18.786,30.343 -17.409,30.343 -16.891,30.861 U1.7
NetD2_1: D2.1 D5.2 Q3.1 R2.2 R4.2 | length 9.2
  Top Layer w0.4: R4.2@-23.876,28.575 -22.805,28.575 -22.479,28.901
  Top Layer w0.8: R2.2 -21.984,26.913 D5.2 -22.479,28.901 D2.1@-20.79,30.59
  Bottom Layer w0.8: v1(-21.4,29.98) -21.4,31.432 Q3.1@-20.955,31.877
NetD2_2: D2.2 R2.1 U1.4 | length 9.7
  Top Layer w0.8: R2.1 -20.447,25.921 -20.447,27.233 -19.232,28.448 -14.859,28.448 -14.351,27.94 U1.4
NetD6_1: D6.1 D9.2 Q2.1 R5.1 R7.2 | length 49.8
  Top Layer w0.4: D9.2 18.587,40.201 20.886,40.201 21.532,39.555 R7.2
  Top Layer w0.6: R5.1 3.878,36.081 D6.1@4.953,37.156
  Top Layer w0.8: v1(2.159,36.068) 3.289,36.068 R5.1 ; v1(5.08,40.132) 5.588,40.132 7.898,42.442 12.75,42.442 14.465,40.727 17.971,40.727 D9.2 ; D9.2@18.587,40.201 18.415,40.373 18.415,41.91 20.433,43.928 22.794,43.928 23.715,44.849 23.715,47.659 23.114,48.26 v4(22.987,48.26)
  Bottom Layer w0.5: Q2.1 Q2.1@21.59,56.457
  Bottom Layer w0.8: v1(2.159,36.068) 5.08,38.989 v1(5.08,40.132)
  Bottom Layer w1: Q2.1@21.59,56.457 21.59,55.701 24.384,52.907 24.384,49.657 v4(22.987,48.26)
NetD6_2: D6.2 R5.2 U2.7 | length 10.8
  Top Layer w0.8: R5.2 3.878,34.531 6.093,32.316 7.689,32.316 8.152,31.853 8.152,30.837 8.646,30.343 10.15,30.343 10.668,30.861 U2.7
NetD7_1: D7.1 D10.2 Q4.1 R6.1 R8.2 | length 31.3
  Top Layer w0.4: R8.2 4.812,28.633 5.08,28.901
  Top Layer w0.8: R6.1 5.588,25.921 5.588,26.9 D10.2 5.08,28.321 ; v1(5.842,28.194) 5.207,28.194 5.08,28.321 ; D7.1@7.112,30.933 5.08,28.901 5.08,28.321
  Bottom Layer w0.8: v1(5.842,28.194) 6.731,27.305 16.256,27.305 17.399,28.448 17.399,33.078 Q4.1
NetD7_2: D7.2 R6.2 U2.4 | length 9.6
  Top Layer w0.8: R6.2 7.125,27.22 7.112,27.233 8.327,28.448 12.573,28.448 13.208,27.813 U2.4
NetD11_2: D11.2 D12.2 Q1.2 Q2.2 R9.2 U3.2 | length 62.3
  Top Layer w0.4: v2(9.05,48.925) 9.05,54.325 9.66,54.935 U3.2
  Bottom Layer w2: v3(-13.716,47.371) -13.716,51.187 Q1.2 ; Q2.2 13.716,51.441 v3(13.716,47.371)
  Bottom Layer w3: D11.2@-3.683,63.605 D11.2 ; 3.661,57.68 3.661,53.997 3.683,53.975
  Bottom Layer w4: Q1.2@-8.763,53.975 -3.661,59.077 D11.2 ; 3.661,57.68 D12.2
  Bottom Layer w11: Q1.2@-8.763,53.975 3.683,53.975 Q2.2@9.05,53.975
NetDS2_2: DS2.2 R15.1 | length 1.5
  Top Layer w0.4: DS2.2 10.744,24.04 R15.1
NetDS3_2: DS3.2 R16.1 | length 1.6
  Top Layer w0.8: R16.1@-19.724,23.876 -19.687,23.913 DS3.2@-18.161,23.913
pads on no net: R12.0 R13.0 R15.0 R16.0 U1.0 U1.2 U2.0 U2.2 U6.0
copper on no net: | length 44.1
  Bottom Layer w0.2: -20.447,27.813 -19.939,27.813 -19.939,27.432 -20.447,27.432 -20.447,27.051 -19.939,27.051 ; -20.066,25.146 -20.574,25.654 -20.574,25.908 -20.447,25.908 -20.066,25.908 ; -19.685,25.146 -19.685,25.908 ; -19.431,27.813 -19.431,27.305 -19.177,27.051 -18.923,27.305 -18.923,27.813 ; -18.415,25.146 -17.907,25.146 -17.907,25.527 -18.415,25.527 -18.415,25.908 -17.907,25.908 ; -17.907,27.813 -17.399,27.813 -17.399,27.432 -17.907,27.432 -17.907,27.051 -17.399,27.051 ; -17.018,27.813 -17.018,27.178 -16.891,27.051 -16.51,27.051 -16.383,27.178 -16.383,27.813 ; -16.142,25.146 -16.764,25.146 -16.764,25.908 -16.129,25.908 -16.129,25.146 ; -16.002,27.051 -15.494,27.051 ; -16.002,27.432 -15.494,27.432 ; -16.002,27.813 -15.494,27.813 ; -15.748,25.146 -15.24,25.146 -15.24,25.908 -15.748,25.908 ; -15.494,24.892 -15.494,25.146 ; -15.113,27.051 -15.113,27.813 ; -15.113,27.432 -14.732,27.432 ; -14.859,25.146 -14.859,25.654 -14.605,25.908 -14.351,25.654 -14.351,25.146 ; -14.859,25.4 -14.478,25.4 ; -14.605,27.051 -14.605,27.432 -14.605,27.813 ; -13.97,25.146 -13.97,25.908 ; -13.97,25.527 -13.462,25.527 ; -13.97,27.432 -14.097,27.432 -14.224,27.559 -14.224,27.813 -13.716,27.813 -13.716,27.051 ; -13.462,25.146 -13.462,25.527 ; -13.462,25.908 -13.462,25.527 ; -13.335,27.051 -13.335,27.178 -13.081,27.432 -13.208,27.432 -13.335,27.559 -13.335,27.813 -13.208,27.813 -12.827,27.813 -12.827,27.051 ; -12.954,25.146 -12.954,25.908 ; -12.954,25.4 -12.446,25.908 -12.446,25.146 ; -12.065,25.146 -12.065,25.654 -11.811,25.908 -11.557,25.654 -11.557,25.146 ; -12.065,25.4 -11.684,25.4 -11.557,25.4 ; -11.824,27.051 -12.446,27.051 -12.446,27.813 -11.811,27.813 -11.811,27.051 ; -11.43,27.051 -11.43,27.813 -11.049,27.432 -10.668,27.813 -10.668,27.178 -10.668,27.051 ; -11.176,25.908 -10.668,25.908 -10.668,25.527 -11.176,25.527 -11.176,25.146 -10.668,25.146 ; -19.304,25.146 -19.304,25.908 -18.796,25.908 -18.796,25.146 -19.304,25.146

## Polygon pours and split planes (outlines as drawn)
GND on Bottom Layer "GND" (solid, remove dead copper, shelved, pour order 34): -25.273,22.479 25.273,22.479 25.273,70 -25.273,70
"BAT 5S" on Bottom Layer "BAT 5S" (solid, remove dead copper, shelved, pour order 24): -3.81,47.625 -3.81,40.64 -1.905,38.735 2.159,38.735 4.064,40.64 4.064,47.625
GND on Top Layer "GND" (solid, remove dead copper, shelved, pour order 42): -25.781,70 25.781,70 25.781,21.971 -25.781,21.971

## Keep-outs
Keep-Out Layer:
  lines w0.254: -95.201,0.127 -95.201,67.127 ; -25.781,21.4 -25.781,70 25.781,70 25.781,21.4 -25.781,21.4

## Other copper
Top Layer:
  region net A0: 17.145,52.959 17.145,52.197 18.288,52.197 18.288,52.959
  region net +3.3v: 17.145,53.975 17.145,53.213 18.288,53.213 18.288,53.975
  region net GND: 17.145,51.943 17.145,51.181 18.288,51.181 18.288,51.943
  region net +3.3v: 17.145,57.531 17.145,56.769 18.288,56.769 18.288,57.531
  region net GND: 17.145,55.499 17.145,54.737 18.288,54.737 18.288,55.499
  region net A1: 17.145,56.515 17.145,55.753 18.288,55.753 18.288,56.515